# Altium PCB Coil_Driver_Rev_A.PcbDoc (part 1 of 2)
Units mm, origin at the board's own origin, x right, y up, seen from the top; angles counter-clockwise.
Board outline 103.83 x 48.83 mm, 4 copper layers (Top Layer, GND, Power, Bottom Layer), stack 1.57 mm thick; 192 components, 105 nets, 467 pads, 152 vias.
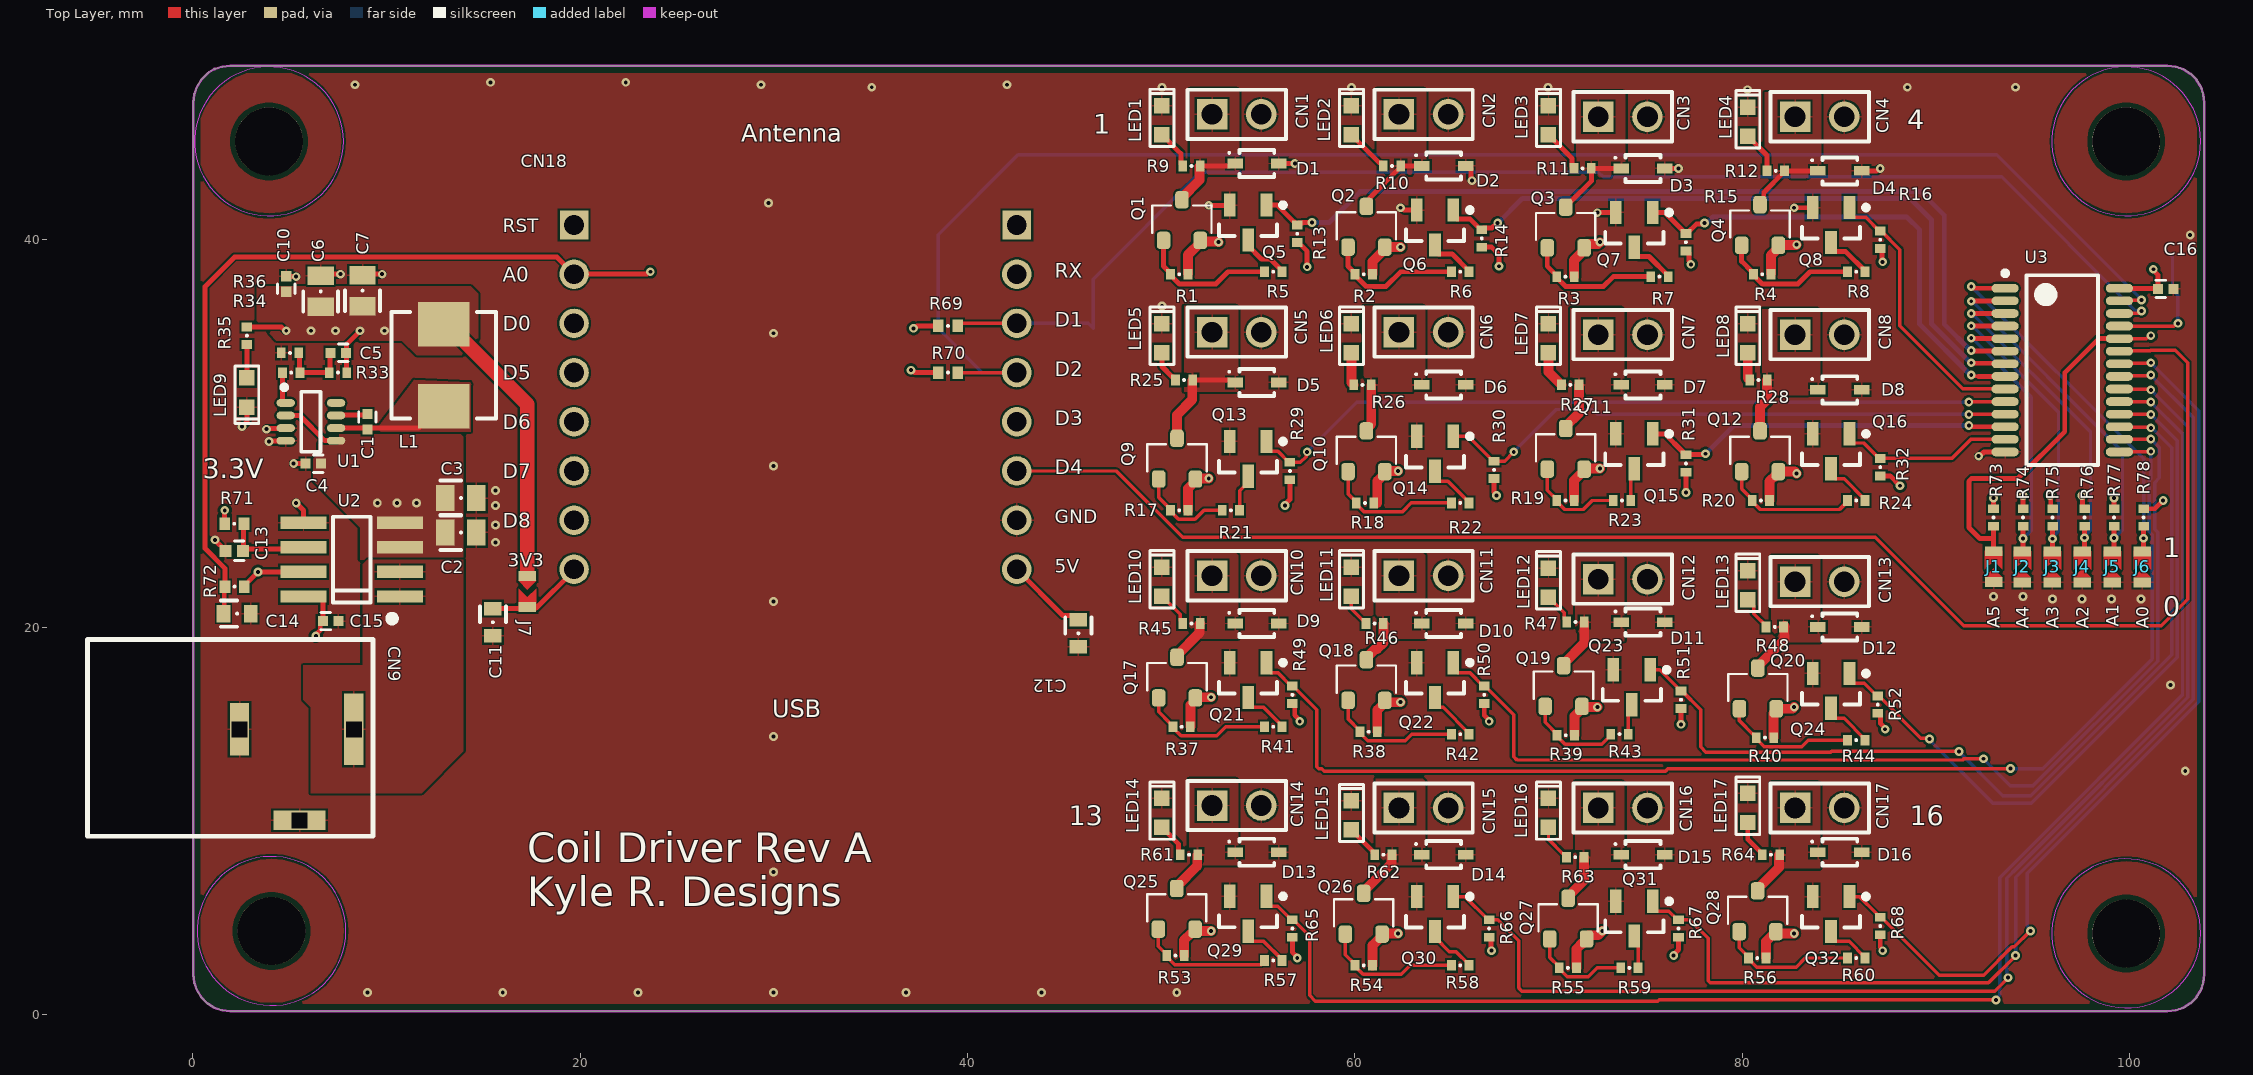
[diagram p0: Top Layer view]
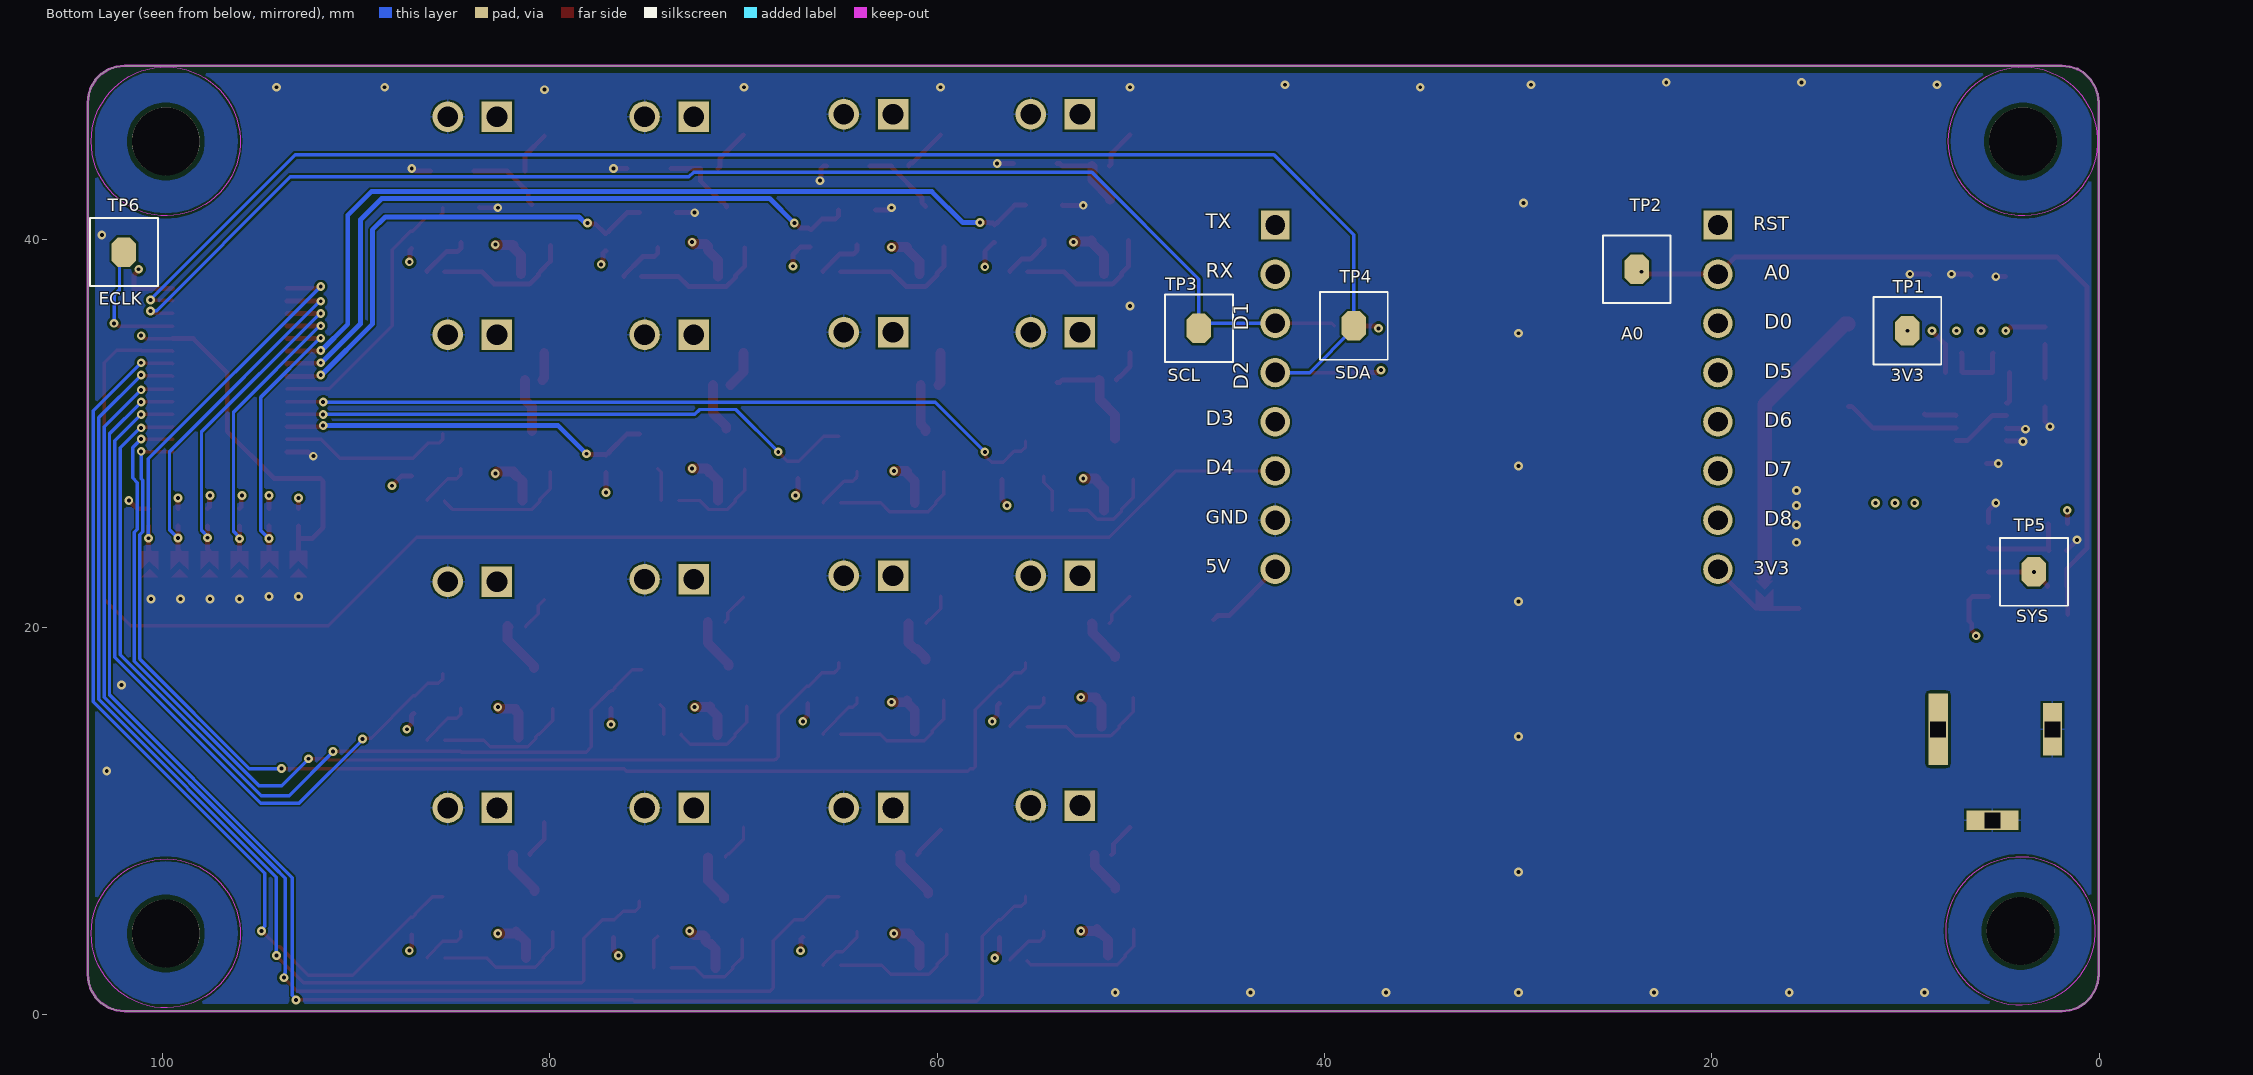
[diagram p1: Bottom Layer view, seen from below]
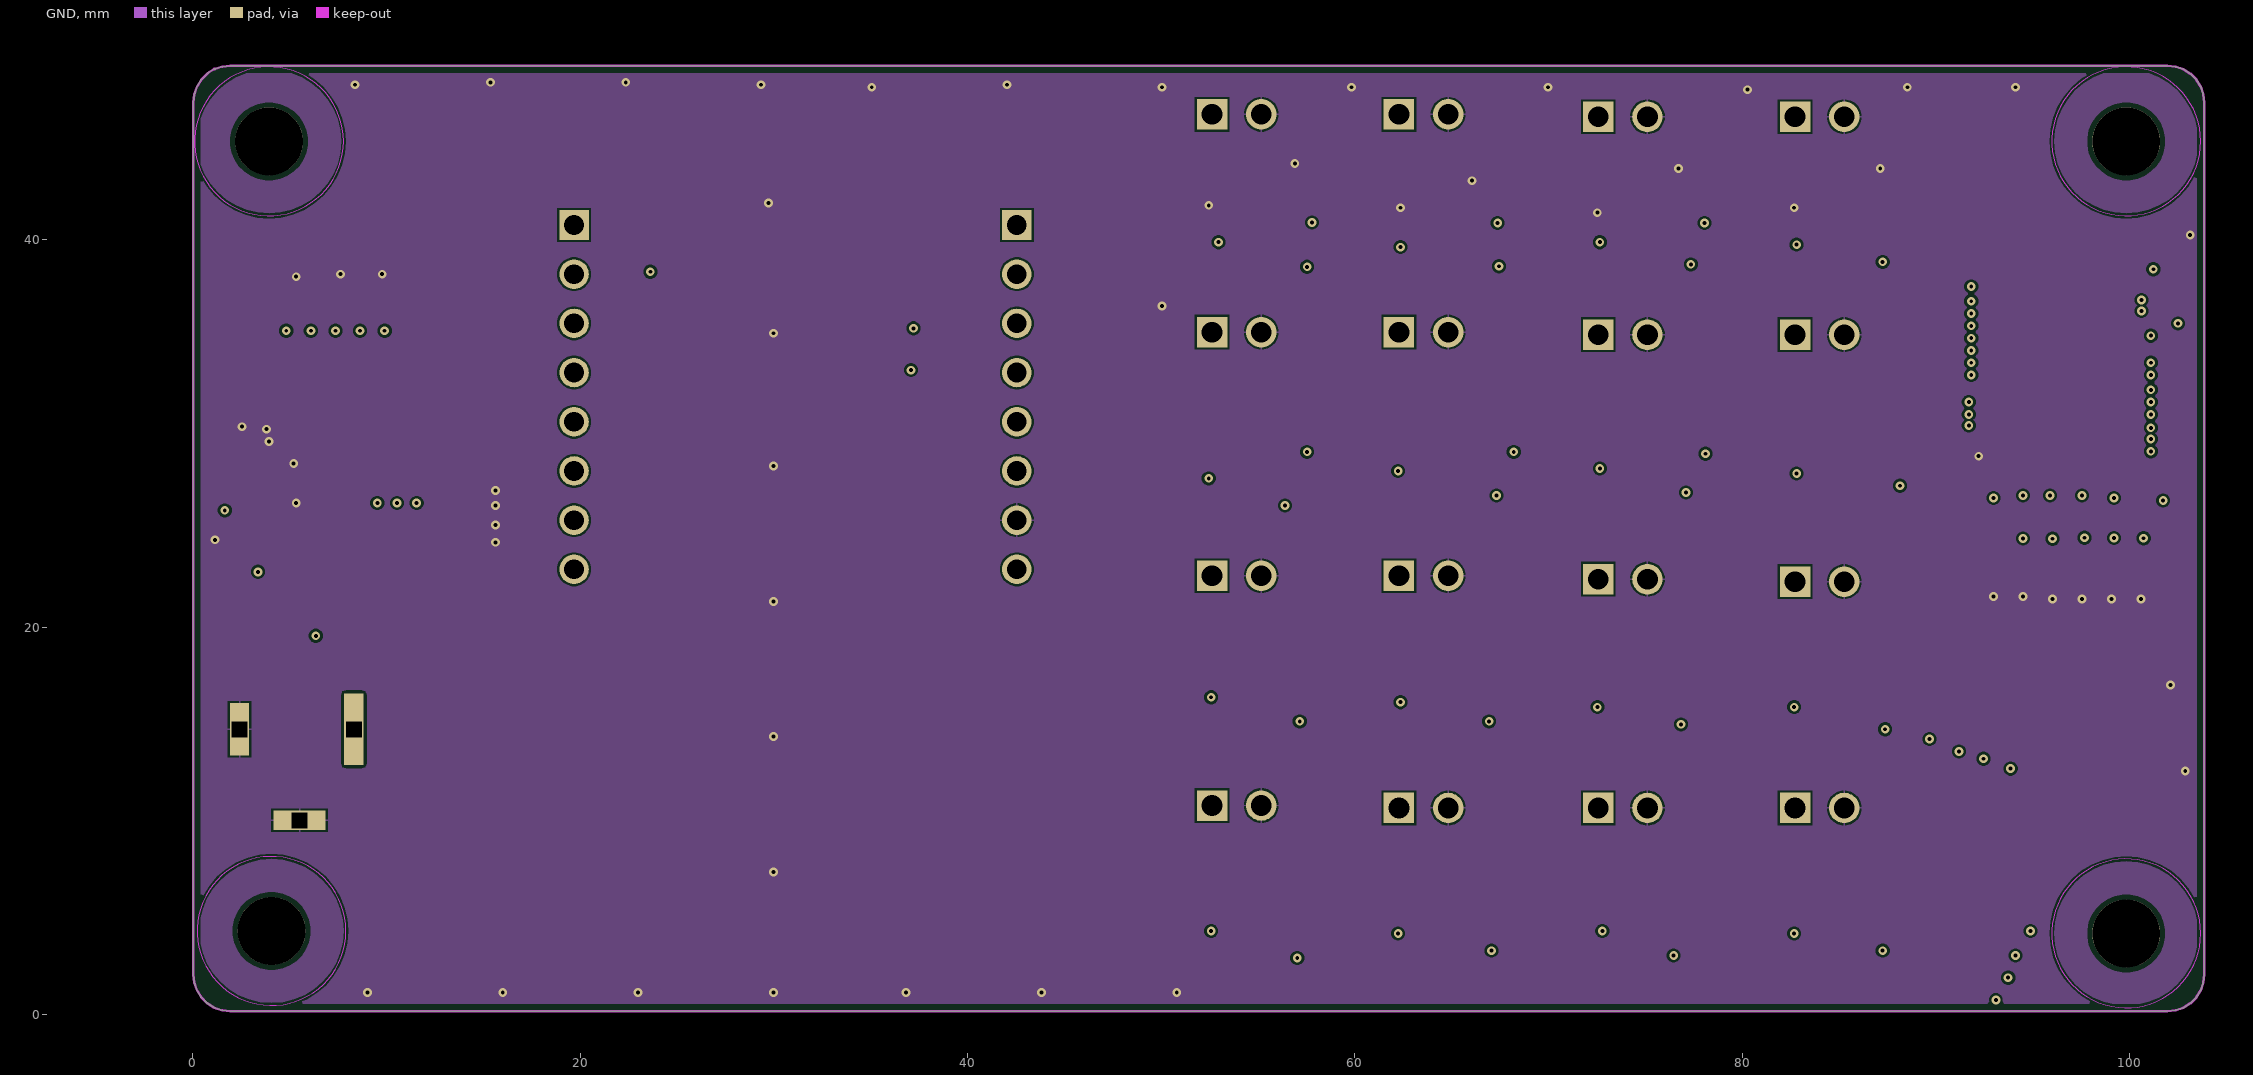
[diagram p2: GND]
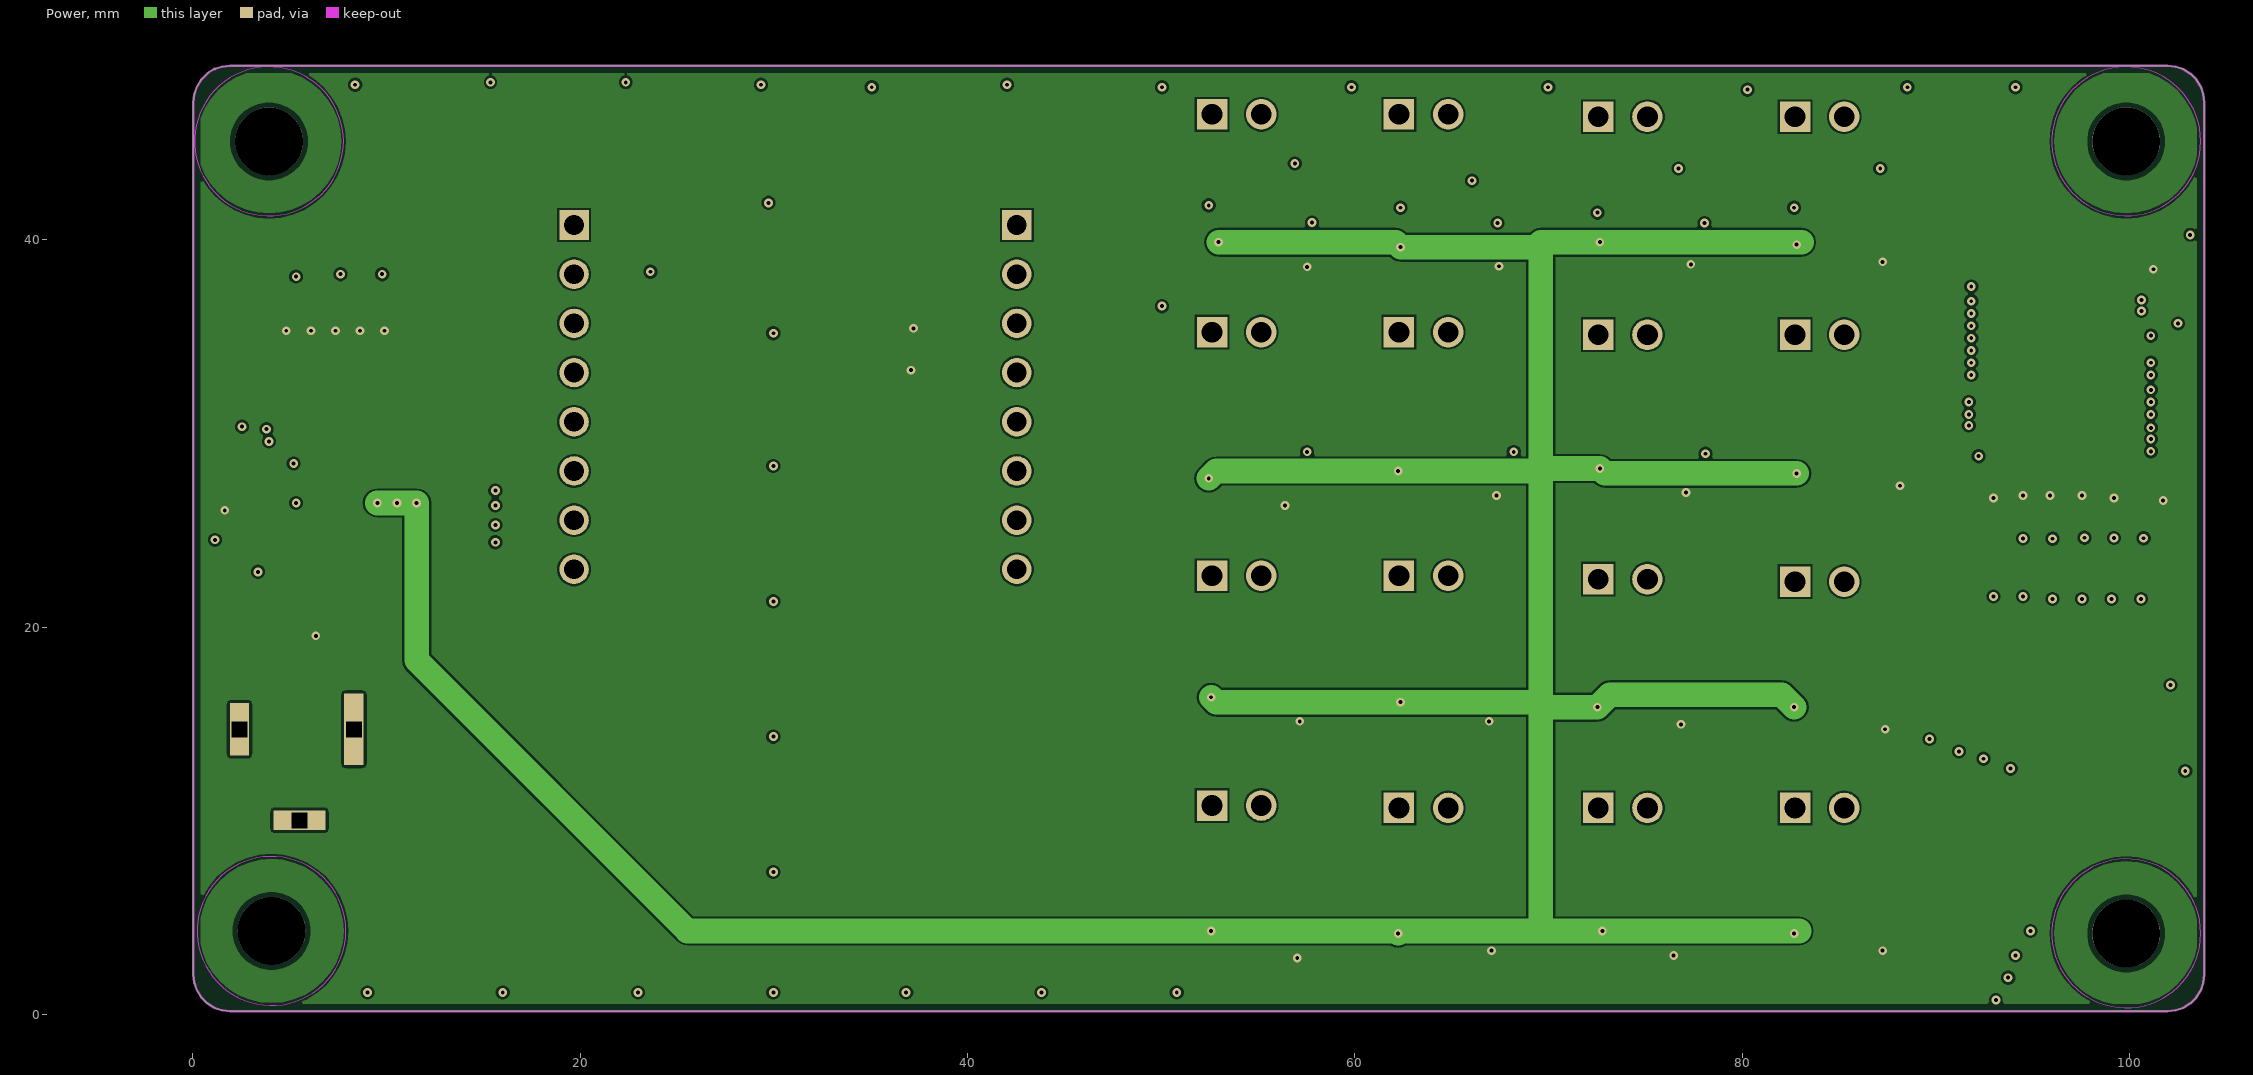
[diagram p3: Power]

## Layer stack, top to bottom
Top Solder: solder mask 0.0127, Solder Resist, Dk 3.8
Top Layer: signal copper 0.035
Dielectric 1: prepreg 0.1, 2313, Dk 4.05
GND: signal copper 0.0175
Core: core 1.265, FR-4, Dk 4.5
Power: signal copper 0.0175
Dielectric 2: prepreg 0.1, 2313, Dk 4.05
Bottom Layer: signal copper 0.035
Bottom Solder: solder mask 0.0127, Solder Resist, Dk 3.8

## Board outline
0.216,1.247 0.075,1.651 0.026,2.081 0.026,47.081 0.075,47.511 0.216,47.915 0.444,48.277 0.753,48.587 ccw(c0.69,48.65) 0.771,48.612 1.099,48.818 ccw(c1.052,48.894) 1.105,48.823 ccw(c1.13,48.908) 1.16,48.824 1.512,48.948 1.942,48.997 101.942,48.997 102.372,48.948 102.776,48.807 103.138,48.579 103.44,48.277 103.668,47.915 103.809,47.511 103.858,47.081 103.858,2.081 103.809,1.651 103.668,1.247 103.44,0.885 103.138,0.583 102.776,0.355 102.372,0.214 101.942,0.165 1.942,0.165 1.512,0.214 1.108,0.355 0.746,0.583 0.444,0.885

## Design rules (kind name [scope] priority, off if disabled: settings)
BoardOutlineClearance [All] p1: gap=0.2 ignorepadtopadclearanceinfootprint=FALSE except(0.381: Poly-OutlineEdge)
Clearance [All] p1: gap=0.102 ignorepadtopadclearanceinfootprint=FALSE except(0.127: Arc-Via Track-Via SMDPad-Via THPad-Via Via-Via Via-Fill Via-Poly Via-Region Via-Text; 0.25: Arc-Hole Track-Hole SMDPad-Hole THPad-Hole Via-Hole Fill-Hole Poly-Hole Region-Hole Text-Hole)
ComponentClearance [All] p1: gap=0.102 collisioncheckmode=3 verticalgap=0.102 showdistances=TRUE
DiffPairsRouting [All] p1: maxlimit=0.102 minlimit=0.102 mostfreqgap=0.102 toplayer_minwidth=0.102 toplayer_maxwidth=1816.048 toplayer_prefwidth=0.102 midlayer1_minwidth=0.102 midlayer1_maxwidth=1816.048 midlayer1_prefwidth=0.102 midlayer2_minwidth=0.102 midlayer2_maxwidth=1816.048 midlayer2_prefwidth=0.102 bottomlayer_minwidth=0.102 bottomlayer_maxwidth=1816.048 bottomlayer_prefwidth=0.102 maxuncoupledlength=12.7
Height [All] p1: minheight=0 maxheight=1816.048 prefheight=12.7
HoleSize [All] p1: absolutevalues=TRUE maxlimit=6.3 minlimit=0.2 maxpercent=80.000 minpercent=20.000
HoleToHoleClearance [All] p1: gap=0.25 allowstackedmicrovias=FALSE
MinimumAnnularRing [All] p1: minimumring=0.076
MinimumSolderMaskSliver [All] p1: minsoldermaskwidth=0
PlaneClearance [All] p1: clearance=0.102
PlaneConnect PlaneConnectPowerPads [InPadClass('PowerPads')] p1: planeconnectstyle=Direct reliefexpansion=0.508 reliefentries=4 reliefconductorwidth=0.254 reliefairgap=0.254
PlaneConnect [All] p2: pad.planeconnectstyle=Relief pad.reliefexpansion=0.3 pad.reliefentries=4 pad.reliefconductorwidth=0.102 pad.reliefairgap=0.102 via.planeconnectstyle=Direct via.reliefexpansion=0.3 via.reliefentries=4 via.reliefconductorwidth=0.127 via.reliefairgap=0.127
PolygonConnect PolygonConnectPowerPads [All vs (InPadClass('PowerPads')) OR InNet('12V') OR InNet('3.3V')OR InNet('NetC1_2')] p1: connectstyle=Direct reliefconductorwidth=0.254 reliefentries=4 polygonreliefangle="90 Angle" airgapwidth=0.254
PolygonConnect [All] p2: thpad.connectstyle=Relief thpad.reliefconductorwidth=0.102 thpad.reliefentries=4 thpad.polygonreliefangle="90 Angle" thpad.airgapwidth=0.102 smdpad.connectstyle=Relief smdpad.reliefconductorwidth=0.102 smdpad.reliefentries=4 smdpad.polygonreliefangle="90 Angle" smdpad.airgapwidth=0.102 via.connectstyle=Direct via.reliefconductorwidth=0.127 via.reliefentries=4 via.polygonreliefangle="90 Angle" via.airgapwidth=0.127
RoutingVias [All] p1: holewidth=0.2 width=0.45 viastyle="Through Hole" minholewidth=0.2 minwidth=0.45 maxholewidth=6.3 maxwidth=6.55
SilkToSilkClearance [All] p1: silktosilkclearance=0
SilkToSolderMaskClearance [IsPad] p1: minsilkscreentomaskgap=0.102 clearancetoexposedcopper=TRUE
SolderMaskExpansion [All] p1: expansion=0.075 istentingtop=FALSE
Width [All] p1: maxlimit=1816.048 minlimit=0.102 preferedwidth=0.102
20 further rules are at their usual default settings.

## Components (designator, comment, footprint, x,y, rotation, side; value= is the part's Value field where it differs from the comment)
C1 "CAP CER 0.1UF 16V X5R 0402" CAPC0402(1005)_L 9.017,30.607 r270 top
C2 "CAP CER 10UF 10V X7R 0805" CAPC0805(2012)_L 13.843,24.892 r0 top
C3 "CAP CER 10UF 10V X7R 0805" CAPC0805(2012)_L 13.843,26.67 r0 top
C4 "CAP CER 0.1UF 16V X5R 0402" CAPC0402(1005)_L 6.223,28.448 r180 top
C5 "CAP CER 47PF 25V C0G/NP0 0402" CAPC0402(1005)_L 7.512,34.163 r180 top
C6 "CAP CER 10UF 10V X7R 0805" CAPC0805(2012)_L 6.604,37.338 r90 top
C7 "CAP CER 10UF 10V X7R 0805" CAPC0805(2012)_L 8.763,37.376 r90 top
C10 "CAP CER 0.1UF 16V X5R 0402" CAPC0402(1005)_L 4.826,37.719 r90 top
C11 "4.7uF" CAPC0603(1608)_L 15.494,20.258 r270 top
C12 "4.7uF" CAPC0603(1608)_L 45.72,19.685 r270 top
C13 "4700pF" CAPC0402(1005)_N 2.143,23.947 r180 top
C14 "1uF" CAPC0603(1608)_L 2.286,20.701 r0 top
C15 "0.1uF" CAPC0402(1005)_L 7.112,20.32 r0 top
C16 "0.1uF" CAPC0402(1005)_L 101.854,37.465 r0 top
CN1 "Header 2_DK" HDR1X2 52.623,46.482 r0 top
CN2 "Header 2_DK" HDR1X2 62.275,46.482 r0 top
CN3 "Header 2_DK" HDR1X2 72.562,46.355 r0 top
CN4 "Header 2_DK" HDR1X2 82.722,46.355 r0 top
CN5 "Header 2_DK" HDR1X2 52.623,35.231 r0 top
CN6 "Header 2_DK" HDR1X2 62.275,35.231 r0 top
CN7 "Header 2_DK" HDR1X2 72.562,35.104 r0 top
CN8 "Header 2_DK" HDR1X2 82.722,35.104 r0 top
CN9 "5.5X2.5MM Barrel Jack" 54-00130 8.313,14.732 r0 top
CN10 "Header 2_DK" HDR1X2 52.623,22.658 r0 top
CN11 "Header 2_DK" HDR1X2 62.275,22.658 r0 top
CN12 "Header 2_DK" HDR1X2 72.562,22.479 r0 top
CN13 "Header 2_DK" HDR1X2 82.722,22.352 r0 top
CN14 "Header 2_DK" HDR1X2 52.623,10.795 r0 top
CN15 "Header 2_DK" HDR1X2 62.275,10.668 r0 top
CN16 "Header 2_DK" HDR1X2 72.562,10.668 r0 top
CN17 "Header 2_DK" HDR1X2 82.722,10.668 r0 top
CN18 "J/Wemo_ESP_Shield" WEMOS_D1 18.323,14.163 r0 top locked
D1 "CMDZ5243BTR" SOD-323 54.933,43.942 r0 top
D2 "CMDZ5243BTR" SOD-323 64.585,43.815 r0 top
D3 "CMDZ5243BTR" SOD-323 74.872,43.688 r0 top
D4 "CMDZ5243BTR" SOD-323 85.032,43.561 r0 top
D5 "CMDZ5243BTR" SOD-323 54.933,32.639 r0 top
D6 "CMDZ5243BTR" SOD-323 64.585,32.512 r0 top
D7 "CMDZ5243BTR" SOD-323 74.872,32.512 r0 top
D8 "CMDZ5243BTR" SOD-323 85.032,32.258 r0 top
D9 "CMDZ5243BTR" SOD-323 54.933,20.193 r0 top
D10 "CMDZ5243BTR" SOD-323 64.585,20.193 r0 top
D11 "CMDZ5243BTR" SOD-323 74.872,20.263 r0 top
D12 "CMDZ5243BTR" SOD-323 85.032,20.014 r0 top
D13 "CMDZ5243BTR" SOD-323 54.933,8.382 r0 top
D14 "CMDZ5243BTR" SOD-323 64.585,8.255 r0 top
D15 "CMDZ5243BTR" SOD-323 74.872,8.255 r0 top
D16 "CMDZ5243BTR" SOD-323 85.032,8.382 r0 top
J1 "A5" RESC0603(1608)_L 92.972,23.129 r90 top
J2 "A4" RESC0603(1608)_L 94.463,23.114 r90 top
J3 "A3" RESC0603(1608)_L 96.012,23.114 r90 top
J4 "A2" RESC0603(1608)_L 97.561,23.114 r90 top
J5 "A1" RESC0603(1608)_L 99.11,23.114 r90 top
J6 "A0" RESC0603(1608)_L 100.659,23.114 r90 top
J7 "Sharks Tooth 0603" RESC0603(1608)_L 17.272,21.844 r270 top
L1 "IHLP2020CZER3R3M01" INDP5252X30N 12.954,33.528 r90 top
LED1 "LTST-C191KGKT" SM-LED-0603#1 50.038,46.176 r270 top
LED2 "LTST-C191KGKT" SM-LED-0603#1 59.817,46.176 r270 top
LED3 "LTST-C191KGKT" SM-LED-0603#1 69.993,46.176 r270 top
LED4 "LTST-C191KGKT" SM-LED-0603#1 80.28,46.101 r270 top
LED5 "LTST-C191KGKT" SM-LED-0603#1 50.038,34.925 r270 top
LED6 "LTST-C191KGKT" SM-LED-0603#1 59.817,34.925 r270 top
LED7 "LTST-C191KGKT" SM-LED-0603#1 69.993,34.925 r270 top
LED8 "LTST-C191KGKT" SM-LED-0603#1 80.28,34.925 r270 top
LED9 "LTST-C191KGKT" SM-LED-0603#2 2.794,32.869 r90 top
LED10 "LTST-C191KGKT" SM-LED-0603#1 50.038,22.352 r270 top
LED11 "LTST-C191KGKT" SM-LED-0603#1 59.817,22.352 r270 top
LED12 "LTST-C191KGKT" SM-LED-0603#1 69.993,22.3 r270 top
LED13 "LTST-C191KGKT" SM-LED-0603#1 80.28,22.173 r270 top
LED14 "LTST-C191KGKT" SM-LED-0603#1 50.038,10.414 r270 top
LED15 "LTST-C191KGKT" SM-LED-0603#1 59.817,10.287 r270 top
LED16 "LTST-C191KGKT" SM-LED-0603#1 69.993,10.414 r270 top
LED17 "LTST-C191KGKT" SM-LED-0603#1 80.28,10.668 r270 top
Q1 "DMG2305UX" DMG2305UX-7 51.069,41.021 r0 top
Q2 "DMG2305UX" DMG2305UX-7 60.594,40.674 r0 top
Q3 "DMG2305UX" DMG2305UX-7 70.881,40.64 r0 top
Q4 "DMG2305UX" DMG2305UX-7 80.914,40.767 r0 top
Q5 "2N7002P,235" SOT23-3L 54.483,40.894 r270 top
Q6 "2N7002P,235" SOT23-3L 64.135,40.64 r270 top
Q7 "2N7002P,235" SOT23-3L 74.422,40.513 r270 top
Q8 "2N7002P,235" SOT23-3L 84.582,40.767 r270 top
Q9 "DMG2305UX" DMG2305UX-7 50.815,28.702 r0 top
Q10 "DMG2305UX" DMG2305UX-7 60.594,29.083 r0 top
Q11 "DMG2305UX" DMG2305UX-7 70.881,29.21 r0 top
Q12 "DMG2305UX" DMG2305UX-7 80.914,29.083 r0 top
Q13 "2N7002P,235" SOT23-3L 54.483,28.691 r270 top
Q14 "2N7002P,235" SOT23-3L 64.135,28.956 r270 top
Q15 "2N7002P,235" SOT23-3L 74.422,29.083 r270 top
Q16 "2N7002P,235" SOT23-3L 84.582,29.083 r270 top
Q17 "DMG2305UX" DMG2305UX-7 50.815,17.399 r0 top
Q18 "DMG2305UX" DMG2305UX-7 60.594,17.272 r0 top
Q19 "DMG2305UX" DMG2305UX-7 70.77,16.961 r0 top
Q20 "DMG2305UX" DMG2305UX-7 80.803,16.839 r0 top
Q21 "2N7002P,235" SOT23-3L 54.483,17.272 r270 top
Q22 "2N7002P,235" SOT23-3L 64.135,17.272 r270 top
Q23 "2N7002P,235" SOT23-3L 74.295,16.902 r270 top
Q24 "2N7002P,235" SOT23-3L 84.582,16.712 r270 top
Q25 "DMG2305UX" DMG2305UX-7 50.8,5.461 r0 top
Q26 "DMG2305UX" DMG2305UX-7 60.452,5.207 r0 top
Q27 "DMG2305UX" DMG2305UX-7 71.008,4.953 r0 top
Q28 "DMG2305UX" DMG2305UX-7 80.787,5.334 r0 top
Q29 "2N7002P,235" SOT23-3L 54.483,5.207 r270 top
Q30 "2N7002P,235" SOT23-3L 64.135,5.196 r270 top
Q31 "2N7002P,235" SOT23-3L 74.422,4.953 r270 top
Q32 "2N7002P,235" SOT23-3L 84.582,5.196 r270 top
R1 "RES 10K OHM 0.1% 1/16W 0402" RESC0402(1005)_L 50.927,38.227 r180 top
R2 "RES 10K OHM 0.1% 1/16W 0402" RESC0402(1005)_L 60.452,38.227 r180 top
R3 "RES 10K OHM 0.1% 1/16W 0402" RESC0402(1005)_L 70.866,38.1 r180 top
R4 "RES 10K OHM 0.1% 1/16W 0402" RESC0402(1005)_L 81.026,38.227 r180 top
R5 "RES 10K OHM 0.1% 1/16W 0402" RESC0402(1005)_L 55.783,38.354 r0 top
R6 "RES 10K OHM 0.1% 1/16W 0402" RESC0402(1005)_L 65.435,38.354 r0 top
R7 "RES 10K OHM 0.1% 1/16W 0402" RESC0402(1005)_L 75.722,38.1 r0 top
R8 "RES 10K OHM 0.1% 1/16W 0402" RESC0402(1005)_L 85.882,38.354 r0 top
R9 "5.1K" RESC0402(1005)_L 51.562,43.815 r180 top
R10 "5.1K" RESC0402(1005)_L 61.913,43.815 r180 top
R11 "5.1K" RESC0402(1005)_L 71.755,43.688 r180 top
R12 "5.1K" RESC0402(1005)_L 81.725,43.561 r180 top
R13 "RES 10K OHM 0.1% 1/16W 0402" RESC0402(1005)_L 57.023,40.317 r90 top
R14 "RES 10K OHM 0.1% 1/16W 0402" RESC0402(1005)_L 66.548,40.074 r90 top
R15 "RES 10K OHM 0.1% 1/16W 0402" RESC0402(1005)_L 77.089,39.878 r90 top
R16 "RES 10K OHM 0.1% 1/16W 0402" RESC0402(1005)_L 87.122,40.005 r90 top
R17 "RES 10K OHM 0.1% 1/16W 0402" RESC0402(1005)_L 50.927,26.035 r180 top
R18 "RES 10K OHM 0.1% 1/16W 0402" RESC0402(1005)_L 60.521,26.416 r180 top
R19 "RES 10K OHM 0.1% 1/16W 0402" RESC0402(1005)_L 70.866,26.543 r180 top
R20 "RES 10K OHM 0.1% 1/16W 0402" RESC0402(1005)_L 80.957,26.543 r180 top
R21 "RES 10K OHM 0.1% 1/16W 0402" RESC0402(1005)_L 53.594,26.035 r0 top
R22 "RES 10K OHM 0.1% 1/16W 0402" RESC0402(1005)_L 65.435,26.416 r0 top
R23 "RES 10K OHM 0.1% 1/16W 0402" RESC0402(1005)_L 73.787,26.543 r0 top
R24 "RES 10K OHM 0.1% 1/16W 0402" RESC0402(1005)_L 85.882,26.543 r0 top
R25 "5.1K" RESC0402(1005)_L 51.181,32.766 r180 top
R26 "5.1K" RESC0402(1005)_L 60.389,32.512 r180 top
R27 "5.1K" RESC0402(1005)_L 71.12,32.512 r180 top
R28 "5.1K" RESC0402(1005)_L 80.836,32.766 r180 top
R29 "RES 10K OHM 0.1% 1/16W 0402" RESC0402(1005)_L 56.642,28.067 r90 top
R30 "RES 10K OHM 0.1% 1/16W 0402" RESC0402(1005)_L 67.183,28.125 r90 top
R31 "RES 10K OHM 0.1% 1/16W 0402" RESC0402(1005)_L 77.089,28.448 r90 top
R32 "RES 10K OHM 0.1% 1/16W 0402" RESC0402(1005)_L 87.122,28.263 r90 top
R33 "RES 90.9K OHM 1% 1/16W 0402" RESC0402(1005)_L 7.493,33.147 r180 top
R34 "4.99K" RESC0402(1005)_L 5.08,33.147 r0 top
R35 "330" RESC0402(1005)_L 2.794,35.052 r270 top
R36 "20K" RESC0402(1005)_L 5.022,34.163 r180 top
R37 "RES 10K OHM 0.1% 1/16W 0402" RESC0402(1005)_L 51.054,14.859 r180 top
R38 "RES 10K OHM 0.1% 1/16W 0402" RESC0402(1005)_L 60.706,14.605 r180 top
R39 "RES 10K OHM 0.1% 1/16W 0402" RESC0402(1005)_L 70.882,14.426 r180 top
R40 "RES 10K OHM 0.1% 1/16W 0402" RESC0402(1005)_L 81.169,14.299 r180 top
R41 "RES 10K OHM 0.1% 1/16W 0402" RESC0402(1005)_L 55.783,14.859 r0 top
R42 "RES 10K OHM 0.1% 1/16W 0402" RESC0402(1005)_L 65.435,14.478 r0 top
R43 "RES 10K OHM 0.1% 1/16W 0402" RESC0402(1005)_L 73.66,14.478 r0 top
R44 "RES 10K OHM 0.1% 1/16W 0402" RESC0402(1005)_L 85.882,14.172 r0 top
R45 "5.1K" RESC0402(1005)_L 51.562,20.193 r180 top
R46 "5.1K" RESC0402(1005)_L 61.018,20.193 r180 top
R47 "5.1K" RESC0402(1005)_L 71.39,20.268 r180 top
R48 "5.1K" RESC0402(1005)_L 81.677,20.014 r180 top
R49 "RES 10K OHM 0.1% 1/16W 0402" RESC0402(1005)_L 56.769,16.51 r90 top
R50 "RES 10K OHM 0.1% 1/16W 0402" RESC0402(1005)_L 66.675,16.51 r90 top
R51 "RES 10K OHM 0.1% 1/16W 0402" RESC0402(1005)_L 76.835,16.256 r90 top
R52 "RES 10K OHM 0.1% 1/16W 0402" RESC0402(1005)_L 86.995,16.002 r90 top
R53 "RES 10K OHM 0.1% 1/16W 0402" RESC0402(1005)_L 50.731,3.048 r180 top
R54 "RES 10K OHM 0.1% 1/16W 0402" RESC0402(1005)_L 60.452,2.54 r180 top
R55 "RES 10K OHM 0.1% 1/16W 0402" RESC0402(1005)_L 70.993,2.413 r180 top
R56 "RES 10K OHM 0.1% 1/16W 0402" RESC0402(1005)_L 80.772,2.921 r180 top
R57 "RES 10K OHM 0.1% 1/16W 0402" RESC0402(1005)_L 55.783,2.794 r0 top
R58 "RES 10K OHM 0.1% 1/16W 0402" RESC0402(1005)_L 65.435,2.54 r0 top
R59 "RES 10K OHM 0.1% 1/16W 0402" RESC0402(1005)_L 74.168,2.413 r0 top
R60 "RES 10K OHM 0.1% 1/16W 0402" RESC0402(1005)_L 85.882,2.921 r0 top
R61 "5.1K" RESC0402(1005)_L 51.435,8.255 r180 top
R62 "5.1K" RESC0402(1005)_L 61.468,8.255 r180 top
R63 "5.1K" RESC0402(1005)_L 71.374,8.128 r180 top
R64 "5.1K" RESC0402(1005)_L 81.476,8.255 r180 top
R65 "RES 10K OHM 0.1% 1/16W 0402" RESC0402(1005)_L 56.769,4.445 r90 top
R66 "RES 10K OHM 0.1% 1/16W 0402" RESC0402(1005)_L 66.929,4.445 r90 top
R67 "RES 10K OHM 0.1% 1/16W 0402" RESC0402(1005)_L 76.708,4.445 r90 top
R68 "RES 10K OHM 0.1% 1/16W 0402" RESC0402(1005)_L 87.122,4.572 r90 top
R69 "4.99K 1%" RESC0402(1005)_N 38.989,35.56 r180 top
R70 "4.99K 1%" RESC0402(1005)_N 38.989,33.147 r180 top
R71 "" RESC0402(1005)_N 2.143,25.344 r0 top
R72 "1K" RESC0402(1005)_N 2.159,22.098 r0 top
R73 "RES 10K OHM 0.1% 1/16W 0402" RESC0402(1005)_L 92.972,25.669 r270 top
R74 "RES 10K OHM 0.1% 1/16W 0402" RESC0402(1005)_L 94.496,25.669 r270 top
R75 "RES 10K OHM 0.1% 1/16W 0402" RESC0402(1005)_L 96.02,25.669 r270 top
R76 "RES 10K OHM 0.1% 1/16W 0402" RESC0402(1005)_L 97.671,25.669 r270 top
R77 "RES 10K OHM 0.1% 1/16W 0402" RESC0402(1005)_L 99.195,25.669 r270 top
R78 "RES 10K OHM 0.1% 1/16W 0402" RESC0402(1005)_L 100.719,25.669 r270 top
TP1 "3V3" Pogo-Testpoint 9.906,35.306 r180 bottom
TP2 "A0" Pogo-Testpoint 23.876,38.481 r180 bottom
TP3 "SCL" Pogo-Testpoint 46.482,35.433 r180 bottom
TP4 "SDA" Pogo-Testpoint 38.481,35.56 r180 bottom
TP5 "SYS" Pogo-Testpoint 3.371,22.86 r180 bottom
TP6 "ECLK" Pogo-Testpoint 101.981,39.37 r180 bottom
U1 "RT6254AHGJ8F" TSOT-23-8 6.096,30.607 r0 top
U2 "ACS725LLCTR-05AB-T" SOG.050/8A 10.693,21.59 r90 top
U3 "PCA9685PW" TSOP65P640X110-28N 96.52,33.274 r0 top

## Footprints (in the part's own frame and the unit in brackets; to place one, negate y for a bottom-side part, rotate by r counter-clockwise, add the part's x,y. Pads: shape width x height; smd on the part's side, far side on the other; paste and mask are expansions set on the pad)
54-00130 [mm]
  rect 1x3.7 hole 0.8 square: 1(0,0)
  rect 1x2.7 hole 0.8 square: 2(-5.9,0)
  rect 2.7x1 hole 0.8 square: 3(-2.8,-4.7)
  silkscreen extent -13.75,-5.53 0.99,4.63, body extent -13.55,-4.95 0.85,4.43, height 10.66
CAPC0402(1005)_L [mm] "Chip Capacitor, Body 1.0x0.5mm, Height 0.7mm, IPC High Density"
  rect 0.52x0.52 smd: 1(-0.4,0) 2(0.4,0)
  silkscreen extent -0.5,-0.45 0,0.45, body extent -0.55,-0.3 0.55,0.3, height 0.7
CAPC0402(1005)_N [mm] "Chip Capacitor, Body 1.0x0.5mm, Height 0.7mm, IPC Medium Density"
  rect 0.62x0.62 smd: 1(-0.45,0) 2(0.45,0)
  silkscreen extent -0.5,-0.5 0,0.5, body extent -0.55,-0.3 0.55,0.3, height 0.7
CAPC0603(1608)_L [mm] "Chip Capacitor, Body 1.6x0.8mm, Height 1.0mm, IPC High Density"
  rect 0.7x0.9 smd: 1(-0.7,0) 2(0.7,0)
  silkscreen extent -0.82,-0.68 0.05,0.68, body extent -0.8,-0.44 0.8,0.43, height 0.86
CAPC0805(2012)_L [mm] "Chip Capacitor, Body 2.0x1.2mm, Height 1.55mm, IPC High Density"
  rect 0.95x1.35 smd: 1(-0.8,0) 2(0.8,0)
  silkscreen extent -1.05,-0.9 0.05,0.9, body extent -1.1,-0.72 1.1,0.72, height 1.55
DMG2305UX-7 [mm] "SOT95P240X110-3L30 - Small Outline Transistor (SOT23), 0.95 mm pitch; 3 pin, 2.90 mm L X 1.30 mm W X 1.10 mm H body"
  rrect50% 0.7x0.9 smd: D(0,1.05) G(-0.95,-1.05) S(0.95,-1.05)
  silkscreen extent -1.53,-0.65 1.53,0.75, body extent -1.45,-1.15 1.45,1.25, height 1.1
HDR1X2 [mil] "Connector; Header; 2 Position"
  rect 62x62 hole 42: 1(0,0)
  round 62 hole 42: 2(100,0)
  silkscreen extent -50,-50 150,50, body extent -49,-50 151,50, height 330
INDP5252X30N [mm] "Precision Wire Wound Inductor, 2-Leads, Body 5.18x5.18mm, IPC Medium Density"
  rect 2.3x2.65 smd: 1(-2.125,0) 2(2.125,0)
  silkscreen extent -2.75,-2.7 2.75,2.7, body extent -2.69,-2.59 2.69,2.59, height 3.1
Pogo-Testpoint [mil] "Test Point - Top Pad Only"
  oct 50x60 smd paste-60: 1(0,0)
  silkscreen extent -69,-69 69,69
RESC0402(1005)_L [mm] "Chip Resistor, Body 1.0x0.5mm, IPC High Density"
  rect 0.45x0.55 smd: 1(-0.45,0) 2(0.45,0)
  silkscreen extent -0.05,-0.05 0.05,0.05, body extent -0.52,-0.27 0.53,0.28, height 0.4
RESC0402(1005)_N [mm] "Chip Resistor, Body 1.0x0.5mm, IPC Medium Density"
  rect 0.55x0.65 smd: 1(-0.5,0) 2(0.5,0)
  silkscreen extent -0.05,-0.05 0.05,0.05, body extent -0.52,-0.27 0.53,0.28, height 0.4
RESC0603(1608)_L [mm] "Chip Resistor, Body 1.6x0.8mm, IPC High Density"
  rect 0.508x0.9 smd: 1(-0.797,0) 2(0.794,0)
  Top Layer region: -0.547,0.45 -0.095,-0.002 -0.099,-0.002 -0.547,-0.45
  Top Layer region: 0.812,-0.448 -0.14,-0.448 0.301,-0.006 -0.143,0.449 0.824,0.449
SM-LED-0603#1 [mm] "0603 LED"
  rect 0.8x0.8 smd: 1(0.75,0) 2(-0.75,0)
  silkscreen extent -1.6,-0.61 1.36,0.62, body extent -0.8,-0.36 0.85,0.37, height 0.67
SM-LED-0603#2 [mm] "0603 LED"
  rect 0.8x0.8 smd: 1(0,0) 2(-1.5,0)
  silkscreen extent -2.35,-0.61 0.61,0.62, body extent -1.55,-0.36 0.1,0.37, height 0.67
SOD-323 [mm] "SODFL, 2-Leads, Body 1.25x2.50mm, IPC Medium Density"
  rect 0.8x0.5 smd: 1(-1.125,0) 2(1.125,0)
  silkscreen extent -1.47,-0.7 0.9,0.7, body extent -1.25,-0.67 1.25,0.67, height 1
SOG.050/8A [mil]
  rect 25x94 smd: 1(0,0) 2(50,0) 3(100,0) 4(150,0) 5(150,196) 6(100,196) 7(50,196) 8(0,196)
  silkscreen extent -49,12 162,136, body extent -23,-27 174,217, height 73
SOT23-3L [mm] "SOT23, 3-Leads, Body 2.9x1.3mm, Pitch 0.95mm, Lead Span 2.5mm, IPC High Density"
  rect 1.2x0.6 smd: 1(-0.9,0.95) 2(-0.9,-0.95) 3(0.9,0)
  silkscreen extent -1.02,-1.5 0.7,1.93, body extent -1.34,-1.5 1.16,1.5, height 1.1
TSOP65P640X110-28N [mm] "TSOP, 28-Leads, Body 9.70x4.40mm, Pitch 0.65mm, IPC Medium Density"
  oval 1.4x0.45 smd: 1(-2.95,4.225) 2(-2.95,3.575) 3(-2.95,2.925) 4(-2.95,2.275) 5(-2.95,1.625) 6(-2.95,0.975) 7(-2.95,0.325) 8(-2.95,-0.325) 9(-2.95,-0.975) 10(-2.95,-1.625) 11(-2.95,-2.275) 12(-2.95,-2.925) 13(-2.95,-3.575) 14(-2.95,-4.225) 15(2.95,-4.225) 16(2.95,-3.575) 17(2.95,-2.925) 18(2.95,-2.275) 19(2.95,-1.625) 20(2.95,-0.975) 21(2.95,-0.325) 22(2.95,0.325) 23(2.95,0.975) 24(2.95,1.625) 25(2.95,2.275) 26(2.95,2.925) 27(2.95,3.575) 28(2.95,4.225)
  silkscreen extent -3.07,-4.9 1.85,5.12, body extent -3.2,-4.9 3.2,4.9, height 1.1
TSOT-23-8 [mm] "TSOT-23, 8 pin"
  oval 0.95x0.4 smd: 1(-1.3,0.975) 2(-1.3,0.325) 3(-1.3,-0.325) 4(-1.3,-0.975) 5(1.3,-0.975) 6(1.3,-0.325) 7(1.3,0.325) 8(1.3,0.975)
  silkscreen extent -1.5,-1.55 0.5,1.9, body extent -1.39,-1.55 1.39,1.55, height 1
WEMOS_D1 [mil] "Wemos D1 footprint"
  rect 58.09x58.09 / inner rect 60x60 / far side rect 58.09x58.09 hole 40: 1(53.62,1047.4) 16(953.62,1047.4)
  round 60 hole 40: 2(53.62,947.4) 3(53.62,847.4) 4(53.62,747.4) 5(53.62,647.4) 6(53.62,547.4) 7(53.62,447.4) 8(53.62,347.4) 9(953.62,347.4) 10(953.62,447.4) 11(953.62,547.4) 12(953.62,647.4) 13(953.62,747.4) 14(953.62,847.4) 15(953.62,947.4)
  body extent 0,16 1020,1370, height 386

## Part data
C1: library part CMP-001-0605-17, "±10% 16V Ceramic Capacitor X5R 0402 (1005 Metric)", Capacitance=100nF, Dielectric Material=Ceramic, Manufacturer="Taiyo Yuden", Manufacturer Part Number=EMK105BJ104KV-F, Package (Imperial)=0402, Package (Metric)=1005, Supplier Part Number=587-1226-1-ND, Temperature (Max)=85°C, Temperature (Min)=-55°C, Temperature Coefficient=X5R, Tolerance=10%, Voltage (Rated)=16V, Height=550µm, Length=1mm, Mounting Type=SMD, Supplier=Digi-Key, Width=500µm
C2 C3 C6 C7: library part CMP-001-0889-04, "10µF ±10% 10V Ceramic Capacitor X7R 0805 (2012 Metric)", Capacitance=10µF, Case Code (Imperial)=0805, Case Code (Metric)=2012, Dielectric Material=Ceramic, Manufacturer Part Number=GRM21BR71A106KA73K, Max Operating Temperature=125°C, Min Operating Temperature=-55°C, Ratings=AEC-Q200, Temperature Coefficient=X7R, Tolerance=10%, Voltage (Rated)=10V, Case/Package=0805, Height=1.4mm, Length=2mm, Mount="Surface Mount", Mounting Type=SMD, Package (Imperial)=0805, Package (Metric)=2012, Packaging="Tape and Reel", Voltage Rating=10V, Width=1.25mm
C4 C10: library part CMP-001-0605-17, "±10% 16V Ceramic Capacitor X5R 0402 (1005 Metric)", Capacitance=0.1uF, Dielectric Material=Ceramic, Manufacturer="Taiyo Yuden", Manufacturer Part Number=EMK105BJ104KV-F, Package (Imperial)=0402, Package (Metric)=1005, Supplier Part Number=587-1226-1-ND, Temperature (Max)=85°C, Temperature (Min)=-55°C, Temperature Coefficient=X5R, Tolerance=10%, Voltage (Rated)=16V, Height=550µm, Length=1mm, Mounting Type=SMD, Supplier=Digi-Key, Width=500µm
C5: library part CMP-001-1119-02, "47pF ±5% 25V Ceramic Capacitor C0G, NP0 0402 (1005 Metric)", Capacitance=47pF, Case Code (Metric)=1005, Case/Package=0402, Dielectric=C0G, Dielectric Material=Ceramic, Manufacturer Part Number=C0402C470J3GACTU, Max Operating Temperature=125°C, Min Operating Temperature=-55°C, Package Quantity=10000, Tolerance=5%, Voltage (Rated)=25V, ClassName=3.3VEXP, Depth=0.5mm, Height=0.5mm, Lead Free="Lead Free", Lead Pitch=0.3mm, Length=1mm, Mount="Surface Mount", Package (Imperial)=0402, Packaging="Tape and Reel", Radiation Hardening=No, REACH SVHC="No SVHC", Termination=SMD/SMT, Thickness=0.022inch, Voltage Rating (DC)=25V, Width=0.02inch
C11 C12: library part CMP-001-0597-12, "CAP CER 4.7uF 16V X5R 0603", Capacitance=4.7µF, Dielectric Material=Ceramic, Package (Imperial)=0603, Package (Metric)=1608, Temperature (Max)=85°C, Temperature (Min)=-55°C, Temperature Coefficient=X5R, Tolerance=10%, Voltage (Rated)=16V, Height=800µm, Length=1.6mm, Mounting Type=SMD
C13: library part CMP-007-0152-08, "CAP CER 4700PF 50V X7R 0402", Capacitance=4.7nF, Dielectric Material=Ceramic, Package (Imperial)=0402, Package (Metric)=1005, Temperature Coefficient=X7R, Tolerance=10%, Voltage (Rated)=50V, Mounting Type=SMD
C14: library part CMP-001-0893-01, "PREFERRED (<3.3V): CAP CER 1UF 10V X7R 0603", Capacitance=1µF, Case Code (Imperial)=0603, Case Code (Metric)=1608, Dielectric=X7R, Dielectric Material=Ceramic, Max Operating Temperature=125°C, Min Operating Temperature=-55°C, Package Quantity=1, Tolerance=10%, Voltage (Rated)=10V, Case/Package=0603, ClassName=CPU, Contact Plating=Tin,Matte, Depth=0.8mm, Dissipation Factor=5%, Height=800µm, Length=1.6mm, Mount="Surface Mount", Mounting Type=SMD, Package (Imperial)=0603, Package (Metric)=1608, Packaging="Tape and Reel", Radiation Hardening=No, REACH SVHC="No SVHC", Temperature Coefficient=X7R, Termination=SMD/SMT, Thickness=0.035inch, Voltage Rating=10V, Voltage Rating (DC)=10V, Width=800µm
C15 C16: library part CMP-001-0605-16, "CAP CER 0.1UF 16v X7R 0402", Capacitance=100nF, Dielectric Material=Ceramic, Package (Imperial)=0402, Package (Metric)=1005, Temperature (Max)=85°C, Temperature (Min)=-55°C, Temperature Coefficient=X7R, Tolerance=10%, Voltage (Rated)=16V, Height=500µm, Length=1mm, Mounting Type=SMD
CN1 CN2 CN3 CN4 CN5 CN6 CN7 CN8 CN10 CN11 CN12 CN13 CN14 CN15 CN16 CN17: library part CMP-001-0280-01, "Header, 2-Pin", Color=Green, Manufacturer="TE Connectivity AMP Connectors", Manufacturer Part Number=826936-2, Component Name="Header 2_DK", ComponentLink1Description=http://www.te.com/commerce/DocumentDelivery/DDEController?Action=srchrtrv&DocNm=826629&DocType=Customer+Drawing&DocLang=English, ComponentLink1URL=http://www.te.com/commerce/DocumentDelivery/DDEController?Action=srchrtrv&DocNm=826629&DocType=Customer+Drawing&DocLang=English, Connector Type="Header, Unshrouded, Breakaway", Contact Finish=Tin, Contact Finish Thickness="78.7µin (2.00µm)", Contact Type="Male Pin", Fastening Type=-, Features=-, Mounting Type="Through Hole", Number of Positions=2, Number of Positions Loaded=All, Number of Rows=1, Packaging=Bulk, Part Status=Active, Pin Count=2, Pricing 1="1=0.23, 10=0.211, 25=0.18, 50=0.1576, 100=0.1463, 250=0.12944, 500=0.1238, 1000=0.10129, 2500=0.09284 (USD)", RoHS="RoHS Compliant", Row Spacing=-, Stock 1=32894, Termination=Solder
CN9: library part CMP-001-1647-02, "CONN JACK R/A PCB 5.5X2.5MM", Current Rating=6.5A, Insulation Color=Black, Manufacturer="Tensility International Corp", Manufacturer Part Number=54-00130, Max Operating Temperature=85°C, Min Operating Temperature=-25°C, Voltage Rating=48V, Body Material="Copper Alloy", Connector Type=Jack, Contact Material=Bronze,Brass, Contact Plating=Silver, Gender=Male, Housing Material=PBT, Mount="Through Hole", Packaging=Bulk, Shielding=Unshielded, Termination=Solder
CN18: "Wemo Mini Shield for ESP-12", Name="Wemo Mini Shield"
D1 D2 D3 D4 D5 D6 D7 D8 D9 D10 D11 D12 D13 D14 D15 D16: library part CMP-001-0939-01, "DIODE ZENER 13V 250MW SOD323", Max Operating Temperature=150°C, Max Power Dissipation=250mW, Min Operating Temperature=-65°C, Tolerance=5%, Zener Voltage=13V, Impedance=13R, Mount="Surface Mount", Packaging="Tape and Reel"
J1 J2 J3 J4 J5 J6 J7: library part CMP-001-1242-02, "Solderable jumper for connecting things"
L1: library part CMP-001-0659-01, "FIXED IND 3.3UH 5A 54.7 MOHM SMD", Case/Package=2020, Current Rating=5A, DC Resistance (DCR)=54.7mR, Inductance=3.3uh, Inductance Tolerance=20%, Max DC Current=8.5A, Max Operating Temperature=125°C, Min Operating Temperature=-55°C, Package Quantity=2000, Self Resonant Frequency=5MHz, Test Frequency=100kHz, Contact Plating=Tin, Core Material="Composite, Metal", Depth=5.43mm, Height=3mm, Height - Seated (Max)=0.118inch, Lead Free="Lead Free", Length=5.74mm, Military Standard=Not, Mount="Surface Mount", Packaging="Tape and Reel", Radiation Hardening=No, REACH SVHC=Unknown, RMS Current (Irms)=5A, Saturation Current=8.5A, Shielding=Shielded, Termination=SMD/SMT, Tolerance=20%, Width=0.204inch
LED1 LED2 LED3 LED4 LED5 LED6 LED7 LED8 LED10 LED11 LED12 LED13 LED14 LED15 LED16 LED17: library part CMP-001-0086-07, "LED GREEN CLEAR THIN 0603 SMD", Color=Green, Current - Test=20mA, Manufacturer="Lite-On Inc", Millicandela Rating=35mcd, Package / Case="0603 (1608 Metric)", Voltage - Forward (Vf) (Typ)=2V, Height=0.55mm, Lens Style/Size="Rectangle with Flat Top, 1.1mm x 0.8mm", Lens Type=Clear, Manufacturer Part Number=LTST-C191KGKT, Mounting Type="Surface Mount", Packaging="Cut Tape (CT)", Pin Count=2, Pricing 1="1=0.3, 10=0.238, 100=0.1296, 250=0.0864, 500=0.07344, 1000=0.05616, 2500=0.05076 (USD)", RoHS="RoHS Compliant", Size / Dimension="1.60mm L x 0.80mm W", Stock 1=84829, Viewing Angle=130°, Wavelength - Dominant=571nm, Wavelength - Peak=574nm
LED9: library part CMP-001-0086-06, "LED GREEN CLEAR THIN 0603 SMD", Color=Green, Current - Test=20mA, Manufacturer="Lite-On Inc", Millicandela Rating=35mcd, Package / Case="0603 (1608 Metric)", Voltage - Forward (Vf) (Typ)=2V, Height=0.55mm, Lens Style/Size="Rectangle with Flat Top, 1.1mm x 0.8mm", Lens Type=Clear, Manufacturer Part Number=LTST-C191KGKT, Mounting Type="Surface Mount", Packaging="Cut Tape (CT)", Pin Count=2, Pricing 1="1=0.3, 10=0.238, 100=0.1296, 250=0.0864, 500=0.07344, 1000=0.05616, 2500=0.05076 (USD)", RoHS="RoHS Compliant", Size / Dimension="1.60mm L x 0.80mm W", Stock 1=84829, Viewing Angle=130°, Wavelength - Dominant=571nm, Wavelength - Peak=574nm
Q1 Q2 Q3 Q4 Q9 Q10 Q11 Q12 Q17 Q18 Q19 Q20 Q25 Q26 Q27 Q28: library part CMP-012-0038-02, "MOSFET P-CH 20V 4.2A SOT23", Current - Continuous Drain (Id) @ 25°C="4.2A (Ta)", Drain to Source Voltage (Vdss)=20V, Input Capacitance (Ciss) @ Vds="808pF @ 15V", Manufacturer="Diodes Incorporated", Manufacturer Part Number=DMG2305UX-7, Operating Temperature="-55°C ~ 150°C (TJ)", Package / Case="TO-236-3, SC-59, SOT-23-3", Power - Max=1.4W, Supplier Device Package=SOT-23, Component Name=DMG2305UX, ComponentLink1Description=http://www.diodes.com/_files/datasheets/DMG2305UX.pdf, ComponentLink1URL=http://www.diodes.com/_files/datasheets/DMG2305UX.pdf, Creator=osman, FET Feature=Standard, FET Type="MOSFET P-Channel, Metal Oxide", Gate Charge (Qg) @ Vgs="10.2nC @ 4.5V", Mounting Type="Surface Mount", Packaging="Cut Tape (CT)", Pin Count=3, Pricing 1="1=0.38, 10=0.311, 100=0.1649, 500=0.10846, 1000=0.0739 (USD)", Rds On (Max) @ Id, Vgs="52 mOhm @ 4.2A, 4.5V", RoHS="RoHS Compliant", Stock 1=78669, Vgs(th) (Max) @ Id="900mV @ 250µA"
Q5 Q6 Q7 Q8 Q13 Q14 Q15 Q16 Q21 Q22 Q23 Q24 Q29 Q30 Q31 Q32: library part CMP-012-0002-01, "MOSFET N-CH 60V 0.36A SOT-23", Case/Package=SOT, Continuous Drain Current (ID)=360mA, Current - Continuous Drain (Id) @ 25°C="360mA (Ta)", Drain to Source Breakdown Voltage=60V, Drain to Source Resistance=1.6R, Drive Voltage (Max Rds On,  Min Rds On)=10V, Gate to Source Voltage (Vgs)=20V, Input Capacitance=50pF, Manufacturer="NXP Semiconductors", Max Operating Temperature=150°C, Max Power Dissipation=350mW, Min Operating Temperature=-55°C, Operating Temperature="-55°C ~ 150°C (TJ)", Package / Case="TO-236-3, SC-59, SOT-23-3", Package Quantity=10000, Power Dissipation=420mW, Power Dissipation (Max)="350mW (Ta)", Supplier Device Package="TO-236AB (SOT23)", Component Name=2N7002P,235, ComponentLink1Description=http://assets.nexperia.com/documents/data-sheet/2N7002P.pdf, ComponentLink1URL=http://assets.nexperia.com/documents/data-sheet/2N7002P.pdf, ComponentLink2Description=https://datasheet.ciiva.com/4439/2n7002p-99415-4439248.pdf, ComponentLink2URL=https://datasheet.ciiva.com/4439/2n7002p-99415-4439248.pdf, ComponentLink3Description=https://datasheet.ciiva.com/6371/2n7002p-6371141.pdf, ComponentLink3URL=https://datasheet.ciiva.com/6371/2n7002p-6371141.pdf, ComponentLink4Description=https://datasheet.ciiva.com/49067/getdatasheetpartid-765733-49067862.pdf, ComponentLink4URL=https://datasheet.ciiva.com/49067/getdatasheetpartid-765733-49067862.pdf, ComponentLink5Description=https://datasheet.ciiva.com/11168/2n7002p-11168552.pdf, ComponentLink5URL=https://datasheet.ciiva.com/11168/2n7002p-11168552.pdf, ComponentLink6Description=https://datasheet.ciiva.com/26921/getdatasheetpartid-765733-26921227.pdf, ComponentLink6URL=https://datasheet.ciiva.com/26921/getdatasheetpartid-765733-26921227.pdf, ComponentLink7Description=https://datasheet.ciiva.com/15216/getdatasheetpartid-496132-15216636.pdf, ComponentLink7URL=https://datasheet.ciiva.com/15216/getdatasheetpartid-496132-15216636.pdf, ComponentLink8Description=https://datasheet.ciiva.com/46633/discretesemiconductors-46633181.pdf, ComponentLink8URL=https://datasheet.ciiva.com/46633/discretesemiconductors-46633181.pdf, ComponentLink9Description=https://assets.nexperia.com/documents/data-sheet/2N7002P.pdf, ComponentLink9URL=https://assets.nexperia.com/documents/data-sheet/2N7002P.pdf, Contact Plating=Tin, Drain to Source Voltage (Vdss)=60V, Fall Time=5ns, FET Feature=-, FET Type=N-Channel, Lead Free="Lead Free", Manufacturer Part Number=2N7002P,235, Max Dual Supply Voltage=60V, Mounting Type="Surface Mount", Number of Elements=1, Number of Pins=3, Packaging="Tape and Reel", Part Status=Active, Pin Count=3, Pricing 1="1=0.14, 10=0.128, 100=0.07, 500=0.043, 1000=0.0294 (USD)", Pricing 2="1=0.16, 10=0.148, 100=0.0969, 500=0.04738, 1000=0.03231 (USD)", Radiation Hardening=No, Rds On (Max) @ Id, Vgs="1.6 Ohm @ 500mA, 10V", Rds On Max=1.6R, Rise Time=4ns, RoHS="RoHS Compliant", Stock 1=109268, Stock 2=177811, Technology="MOSFET (Metal Oxide)", Turn-Off Delay Time=10ns, Turn-On Delay Time=3ns, Vgs (Max)=±20V, Vgs(th) (Max) @ Id="2.4V @ 250µA"
R1 R2 R3 R4 R5 R6 R7 R8 R13 R14 R15 R16 R17 R18 R19 R20 R21 R22 R23 R24 R29 R30 R31 R32 R37 R38 R39 R40 R41 R42 R43 R44 R49 R50 R51 R52 R53 R54 R55 R56 R57 R58 R59 R60 R65 R66 R67 R68 R73 R74 R75 R76 R77 R78: library part CMP-001-0950-02, "10 kOhms ±0.1% 0.063W, 1/16W Chip Resistor 0402 (1005 Metric) Automotive AEC-Q200 Thin Film", Case Code (Imperial)=0402, Case Code (Metric)=1005, Max Operating Temperature=155°C, Max Power Dissipation=63mW, Min Operating Temperature=-55°C, Package Quantity=10000, Resistance=10k, Temperature Coefficient=25ppm/°C, Tolerance=0.1%, Case/Package=0402, Composition="Thin Film", Contact Plating=Tin,Matte, Features="Moisture Resistant", Height=0.016inch, Length=0.039inch, Mount="Surface Mount", Number of Terminations=2, Packaging="Tape and Reel", Radiation Hardening=No, Width=0.02inch
R9 R10 R11 R12 R25 R26 R27 R28 R45 R46 R47 R48 R61 R62 R63 R64: library part CMP-007-0525-15, "RES SMD 5.1K OHM 1% 1/10W 0402", Max Operating Temperature=155°C, Max Power Dissipation=100mW, Min Operating Temperature=-55°C, Package (Imperial)=0402, Package (Metric)=1005, Package Quantity=10000, Power=63mW, Resistance=5.1k, Temperature Coefficient=100ppm/°C, Tolerance=1%, Voltage Rating=50V, Composition="Thick Film", Contact Plating=Tin, Depth=0.5mm, Height=350µm, Lead Free="Lead Free", Length=1mm, Military Standard=Not, Mount="Surface Mount", Number of Terminations=2, Packaging="Tape and Reel", Power Rating=100mW, REACH SVHC="No SVHC", Termination=SMD/SMT, Voltage Rating (DC)=50V, Weight=2.8E-05oz, Width=500µm
R33: library part CMP-007-0589-13, "90.9 kOhms ±1% 0.063W, 1/16W Chip Resistor 0402 (1005 Metric) Automotive AEC-Q200 Thick Film", Operating Temperature="-55°C ~ 155°C", Package (Imperial)=0402, Package (Metric)=1005, Power=63mW, Resistance=90.9k, Temperature Coefficient=±100ppm/°C, Tolerance=1%, Height=400µm, Length=1mm, Termination=SMD/SMT
R34: library part CMP-00076-12, "RES SMD 4.99K OHM 1% 1/16W 0402", Package (Imperial)=0402, Package (Metric)=1005, Power=63mW, Resistance=4.99k, Temperature Coefficient=100ppm/°C, Tolerance=1%, Height=400µm, Length=1mm, Termination=SMD/SMT
R35: library part CMP-00021-18, "RES SMD 330 OHM 1% 1/10W 0402", Package (Imperial)=0402, Package (Metric)=1005, Power=63mW, Temperature Coefficient=100ppm/°C, Tolerance=1%, Height=400µm, Length=1mm, Resistance=330, Termination=SMD/SMT
R36: library part CMP-007-0427-12, "RES 20K OHM 1% 1/10W 0402", Operating Temperature="-55°C ~ 155°C", Package (Imperial)=0402, Package (Metric)=1005, Power=63mW, Resistance=20k, Temperature Coefficient=±100ppm/°C, Tolerance=1%, Height=400µm, Length=1mm, Termination=SMD/SMT
R69 R70: library part "RES 4.99K OHM 1% 1/10W 0402", "4.99K 0402", Manufacturer="Panasonic Electronic Components", Manufacturer Part Number=ERJ-2RKF4991X, Operating Temperature="-55°C ~ 155°C", Package / Case=0402, Power (Watts)="0.1W, 1/10W", Resistance (Ohms)=4.99k, Supplier Part Number 1=P4.99KLCT-ND, Temperature Coefficient=±100ppm/°C, Tolerance=±1%, Category=Resistors, ComponentLink1Description=http://industrial.panasonic.com/www-cgi/jvcr13pz.cgi?E+PZ+3+AOA0002+ERJ2RKF4991X+7+WW, ComponentLink1URL=http://industrial.panasonic.com/www-cgi/jvcr13pz.cgi?E+PZ+3+AOA0002+ERJ2RKF4991X+7+WW, Composition="Thick Film", Features="Automotive AEC-Q200", Height="0.016\" (0.40mm)", Number of Terminations=2, Packaging="Cut Tape (CT)", Pricing 1="1=0.1, 50=0.0196, 100=0.0149, 250=0.01104, 500=0.00816, 1000=0.00544, 5000=0.00383 (USD)", RoHS="RoHS Compliant", Size / Dimension="0.039\" L x 0.020\" W (1.00mm x 0.50mm)", Stock 1=765320, Supplier 1=Digi-Key, Supplier Device Package=0402
R71: library part CMP-007-0302-14, "RES 0.0 OHM JUMPER 0402 1/10W SMD", Operating Temperature="-55°C ~ 155°C", Package (Imperial)=0402, Package (Metric)=1005, Power=63mW, Resistance=0, Temperature Coefficient=-, Tolerance=0%, Height=400µm, Length=1mm, Termination=SMD/SMT
R72: library part CMP-007-0405-12, "RES 1K OHM 1% 1/16W 0402", Package (Imperial)=0402, Package (Metric)=1005, Power=63mW, Resistance=1k, Temperature Coefficient=100ppm/°C, Tolerance=1%, Height=400µm, Length=1mm, Termination=SMD/SMT, Width=500µm
TP1: library part CMP-001-0557-04, "Test Point- Current one"
TP2 TP3 TP4 TP5 TP6: library part CMP-001-0557-03, "Test Point- Current one", Component Name=TestPoint, Pin Count=1
U1: library part CMP-001-1377-03, "IC REG BUCK ADJ 4A TSOT23-8", Max Input Voltage=18V, Max Operating Temperature=85°C, Max Output Voltage=5V, Min Input Voltage=4.5V, Min Operating Temperature=-40°C, Min Output Voltage=600mV, Output Current=4A, Switching Frequency=500kHz, Manufacturer Part Number=RT6254AHGJ8F, Number of Outputs=1, Output Configuration=Positive, Output Type=Adjustable, Synchronous Rectifier=Yes
U2: library part CMP-010-0118-03, "Current Sensor 5A 1 Channel Hall Effect, Differential Bidirectional", Current - Sensing=5A, Frequency="DC ~ 120kHz", Operating Temperature="-40°C ~ 150°C (TA)", Voltage - Supply="3V ~ 3.6V", Accuracy=0.9%, Linearity=1.5%, Polarization=Bidirectional, Response Time=4µs, Sensitivity=264mV/A, Sensor Type="Hall Effect, Differential"
U3: library part CMP-001-1815-01, "IC LED DRVR LIN DIM 25MA 28TSSOP / LED Driver 10000uA Supply Current 28-Pin TSSOP", Case/Package=TSSOP, High Level Output Current=10mA, Low Level Output Current=400A, Max Input Voltage=5.5V, Max Operating Temperature=85°C, Max Output Current=25mA, Min Input Voltage=2.3V, Min Operating Temperature=-40°C, Nominal Supply Current=10A, Power Dissipation=400W, Switching Frequency=1MHz, Max Output Voltage=5.5V, Max Supply Voltage=5.5V, Min Supply Voltage=2.3V, Mount="Surface Mount", Number of Outputs=16, Number of Pins=28, Output Current=25mA, output voltage=5.5V, Packaging="Tape and Reel", Radiation Hardening=No, REACH SVHC="No SVHC", RoHS Compliant=Yes, Supply Current=10A

## Free pads (board coordinates)
  round 3.5 hole 3.5 unplated: 0(3.937,45.085) 0(4.064,4.318) 0(99.822,4.191) 0(99.822,45.085)

## Via types
v1: diameter 0.45, hole 0.203, Top Layer to Bottom Layer, 91 vias
v2: diameter 0.457, hole 0.203, Top Layer to Bottom Layer, 60 vias
v3: diameter 0.457, hole 0.203, Top Layer to Bottom Layer, tented both sides, 1 vias

## Nets (pads, with @x,y where several pads share a name; then routed paths per layer and width w, separated by ;. In a path a pad name is that pad's centre, name@x,y a point inside that pad or via, vN(x,y) a via of type N, cw(c..) or ccw(c..) an arc to the next point about the centre after c; other vN are vias at no path point)
3.3V: C5.1 C6.1 C7.1 C10.1 C15.1 C16.1 J7.1 L1.2 R13.1 R14.1 R15.1 R16.1 R29.1 R30.1 R31.1 R32.1 R33.1 R35.1 R49.1 R50.1 R51.1 R52.1 R65.1 R66.1 R67.1 R68.1 R69.2 R70.2 R71.1 R73.1 R74.1 R75.1 R76.1 R77.1 R78.1 TP1.1 U2.8 U3.28 | length 50.7
  Top Layer w0.254: R71.1@1.643,25.344 1.647,25.348 1.647,26.031 v1(1.651,26.035) ; R35.1@2.794,35.502 4.575,35.502 4.771,35.306 v2(4.826,35.306) ; U2.8@5.715,21.59 6.522,21.59 6.712,21.399 C15.1@6.712,20.32 6.579,20.187 6.579,19.84 6.35,19.611 v1(6.35,19.558) ; R33.1@7.943,33.147 7.943,34.613 v2(8.636,35.306) ; v1(37.084,33.274) 37.137,33.274 37.264,33.147 R70.2@38.489,33.147 ; v1(37.211,35.433) 37.264,35.433 37.391,35.56 R69.2@38.489,35.56 ; v1(56.388,26.289) 56.388,26.342 56.642,26.596 R29.1@56.642,27.617 ; R65.1@56.769,3.995 56.769,3.228 57.023,2.974 v1(57.023,2.921) ; R49.1@56.769,16.06 56.793,16.06 56.891,15.962 56.891,15.454 57.15,15.195 v1(57.15,15.142) ; R13.1@57.023,39.867 57.073,39.867 57.531,39.409 v1(57.531,38.608) ; R14.1@66.548,39.624 67.056,39.624 67.437,39.243 v1(67.437,38.637) ; R50.1@66.675,16.06 66.675,15.449 66.929,15.195 v1(66.929,15.142) ; R66.1@66.929,3.995 67.018,3.906 67.018,3.34 v1(67.056,3.302) ; R30.1@67.183,27.675 67.183,26.977 67.31,26.85 v1(67.31,26.797) ; v1(76.454,3.048) 76.454,3.101 76.708,3.355 R67.1@76.708,3.995 ; v1(76.835,14.986) R51.1@76.835,15.806 ; v1(77.089,26.953) R31.1@77.089,27.998 ; R15.1@77.089,39.428 77.139,39.428 77.237,39.33 77.237,38.894 77.343,38.788 v1(77.343,38.735) ; R52.1@86.995,15.552 87.045,15.552 87.143,15.454 87.143,15.018 87.376,14.785 v1(87.376,14.732) ; R68.1@87.122,4.122 87.122,3.482 87.249,3.355 v1(87.249,3.302) ; R32.1@87.122,27.813 87.63,27.813 v1(88.138,27.305) ; R16.1@87.122,39.555 87.211,39.466 87.211,38.9 v1(87.249,38.862) ; v1(92.964,26.67) 92.968,26.666 92.968,26.123 R73.1@92.972,26.119 ; v1(94.488,26.797) 94.492,26.793 94.492,26.123 R74.1@94.496,26.119 ; v1(95.885,26.797) 95.923,26.759 95.923,26.216 R75.1@96.02,26.119 ; v1(97.536,26.797) 97.574,26.759 97.574,26.216 R76.1@97.671,26.119 ; v1(99.187,26.67) 99.191,26.666 99.191,26.123 R77.1@99.195,26.119 ; U3.28@99.47,37.499 99.487,37.482 101.437,37.482 C16.1@101.454,37.465 101.454,38.193 101.219,38.428 v1(101.219,38.481) ; R78.1@100.719,26.119 101.303,26.119 v1(101.727,26.543)
  Top Layer w0.762: L1.2@12.954,35.653 13.129,35.653 17.272,31.51 J7.1@17.272,22.641
  other v2: 6.096,35.306 7.366,35.306 9.906,35.306